# Altium PCB first_test.PcbDoc (part 2 of 5)
Units mil, origin at the board's own origin, x right, y up, seen from the top; angles counter-clockwise.
Board outline 3440.59 x 3087.6 mil, 4 copper layers (Top Layer, GND, VCC, Bottom Layer); 175 components, 91 nets, 2807 pads, 1128 vias.
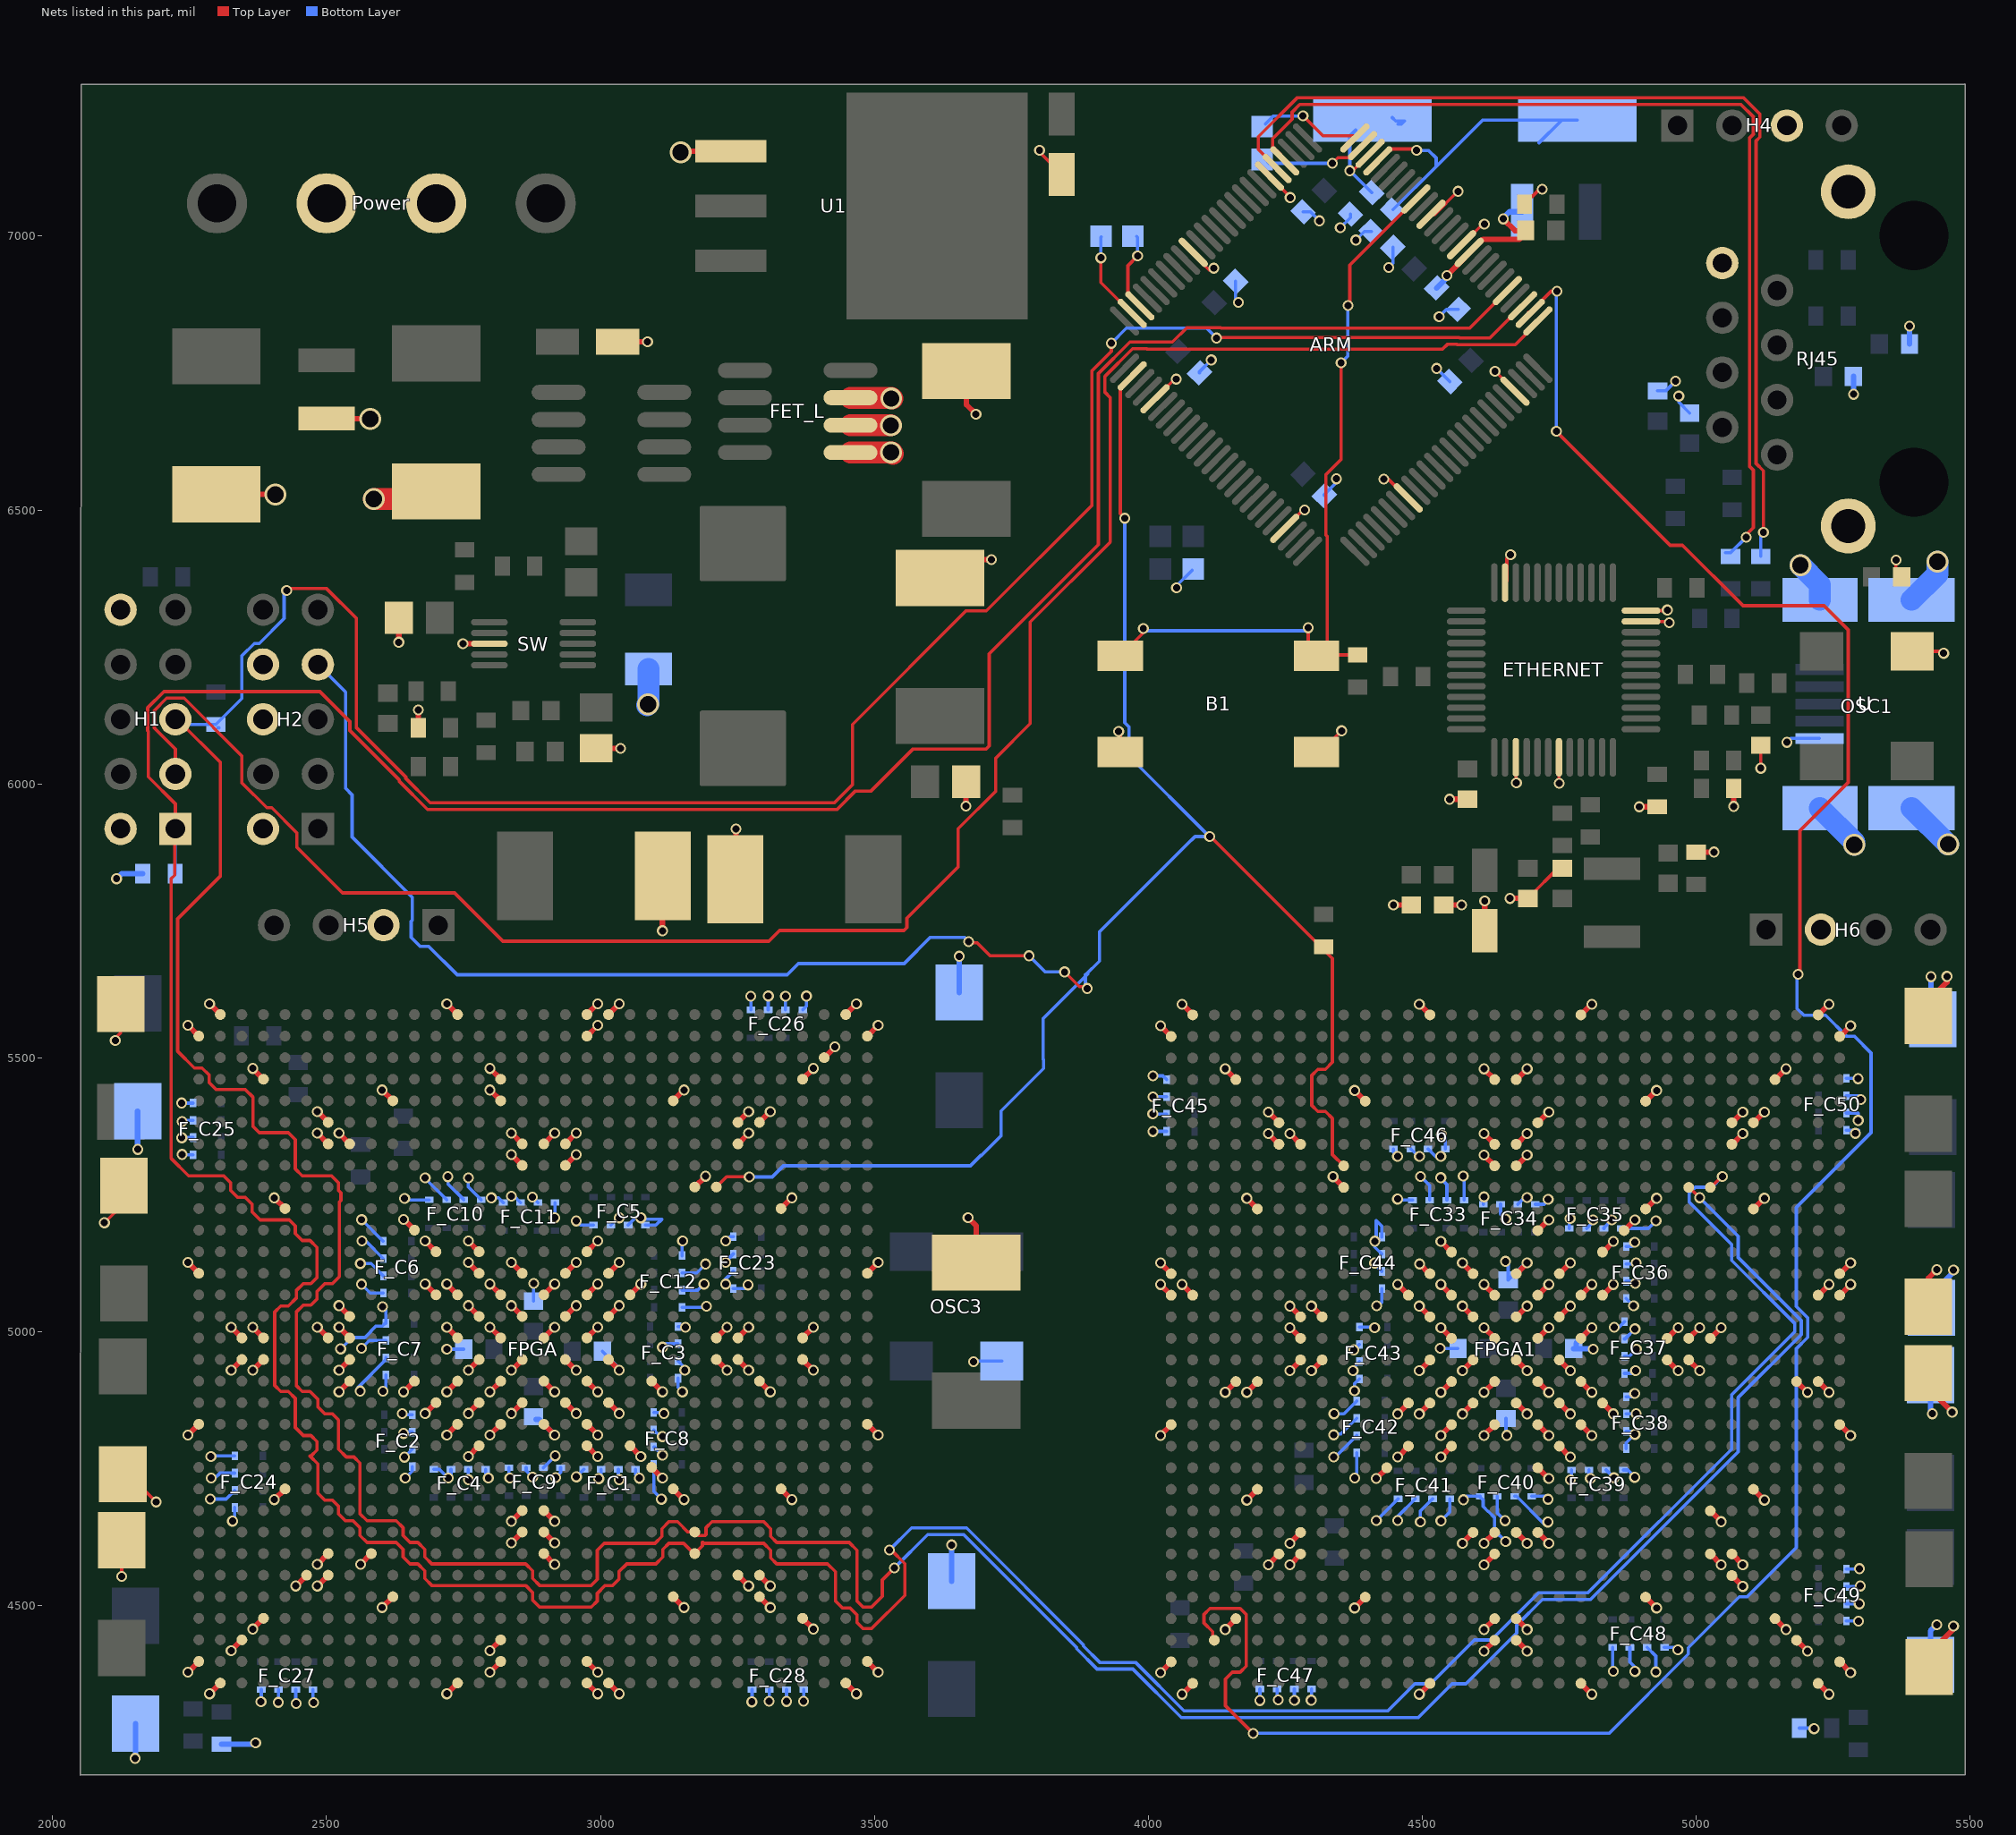
[diagram p4: the nets of this part, all layers, seen from the top]

## Via types
v1: diameter 20, hole 13, Top Layer to Bottom Layer, tented both sides, 907 vias
v2: diameter 20, hole 13, Top Layer to Bottom Layer, 189 vias
v3: diameter 30, hole 20, Top Layer to Bottom Layer, 14 vias
v4: diameter 40, hole 30, Top Layer to Bottom Layer, 12 vias
v5: diameter 50, hole 40, Top Layer to Bottom Layer, 5 vias
v6: diameter 25, hole 20, Top Layer to Bottom Layer, 1 vias

## Nets (pads, with @x,y where several pads share a name; then routed paths per layer and width w, separated by ;. In a path a pad name is that pad's centre, name@x,y a point inside that pad or via, vN(x,y) a via of type N, cw(c..) or ccw(c..) an arc to the next point about the centre after c; other vN are vias at no path point) (continued)
GND: A_C6.2 A_C7.2 A_C8.2 A_C9.2 A_C10.2 A_C11.2 A_C12.2 ARM.11 ARM.15 ARM.31 ARM.41 ARM.55 ARM.72 ARM.83 ARM.97 B1.3 B1.4 C1.2 C2.2 C3.2 C4.1 C5.2 C6.1 C11.2 C12.2 C13.2 C19.2 C20.2 C21.2 C22.2 C23.2 C24.2 C25.2 C26.1 C27.1 C28.2 C34.2 C41.1 C42.1 C43.1 diode.1 ETHERNET.15 ETHERNET.19 ETHERNET.35 ETHERNET.36 ETHERNET.47 F_60.2 F_C1.5 F_C1.6 F_C1.7 F_C1.8 F_C2.5 F_C2.6 F_C2.7 F_C2.8 F_C3.5 F_C3.6 F_C3.7 F_C3.8 F_C4.5 F_C4.6 F_C4.7 F_C4.8 F_C5.5 F_C5.6 F_C5.7 F_C5.8 F_C6.5 F_C6.6 F_C6.7 F_C6.8 F_C7.5 F_C7.6 F_C7.7 F_C7.8 F_C8.5 F_C8.6 F_C8.7 F_C8.8 F_C9.5 F_C9.6 F_C9.7 F_C9.8 F_C10.5 F_C10.6 F_C10.7 F_C10.8 F_C11.5 F_C11.6 F_C11.7 F_C11.8 F_C12.5 F_C12.6 F_C12.7 F_C12.8 F_C13.2 F_C14.2 F_C15.2 F_C16.2 F_C17.2 F_C18.2 F_C19.2 F_C20.2 F_C21.2 F_C22.2 F_C23.5 F_C23.6 F_C23.7 F_C23.8 F_C24.5 F_C24.6 F_C24.7 F_C24.8 F_C25.5 F_C25.6 F_C25.7 F_C25.8 F_C26.5 F_C26.6 F_C26.7 F_C26.8 F_C27.5 F_C27.6 F_C27.7 F_C27.8 F_C28.5 F_C28.6 F_C28.7 F_C28.8 F_C29.2 F_C30.2 F_C31.2 F_C32.2 F_C33.5 F_C33.6 F_C33.7 F_C33.8 F_C34.5 F_C34.6 F_C34.7 F_C34.8 F_C35.5 F_C35.6 F_C35.7 F_C35.8 F_C36.5 F_C36.6 F_C36.7 F_C36.8 F_C37.5 F_C37.6 F_C37.7 F_C37.8 F_C38.5 F_C38.6 F_C38.7 F_C38.8 F_C39.5 F_C39.6 F_C39.7 F_C39.8 F_C40.5 F_C40.6 F_C40.7 F_C40.8 F_C41.5 F_C41.6 F_C41.7 F_C41.8 F_C42.5 F_C42.6 F_C42.7 F_C42.8 F_C43.5 F_C43.6 F_C43.7 F_C43.8 F_C44.5 F_C44.6 F_C44.7 F_C44.8 F_C45.5 F_C45.6 F_C45.7 F_C45.8 F_C46.5 F_C46.6 F_C46.7 F_C46.8 F_C47.5 F_C47.6 F_C47.7 F_C47.8 F_C48.5 F_C48.6 F_C48.7 F_C48.8 F_C49.5 F_C49.6 F_C49.7 F_C49.8 F_C50.5 F_C50.6 F_C50.7 F_C50.8 F_C51.2 F_C52.2 F_C53.2 F_C54.2 F_C55.2 F_C56.2 F_C58.2 F_C59.2 F_C61.2 F_C62.2 F_C63.2 F_C64.2 F_C65.2 FET_L.1 FET_L.2 FET_L.3 FPGA1.A2 FPGA1.A13 FPGA1.A19 FPGA1.A20 FPGA1.A31 FPGA1.AA14 FPGA1.AA19 FPGA1.AA21 FPGA1.AB22 FPGA1.AC5 FPGA1.AC23 FPGA1.AC28 FPGA1.AD16 FPGA1.AD17 FPGA1.AE16 FPGA1.AE17 FPGA1.AF7 FPGA1.AF9 FPGA1.AF17 FPGA1.AG6 FPGA1.AG7 FPGA1.AG26 FPGA1.AG27 FPGA1.AH10 FPGA1.AH23 FPGA1.AH27 FPGA1.AJ4 FPGA1.AJ29 FPGA1.AK3 FPGA1.AK15 FPGA1.AL1 FPGA1.AL15 FPGA1.AL19 FPGA1.AL32 FPGA1.AM2 FPGA1.AM13 FPGA1.AM19 FPGA1.AM20 FPGA1.AM31 FPGA1.B1 FPGA1.B19 FPGA1.B32 FPGA1.D4 FPGA1.D15 FPGA1.D29 FPGA1.E10 FPGA1.E15 FPGA1.E23 FPGA1.F7 FPGA1.F26 FPGA1.F27 FPGA1.G7 FPGA1.G8 FPGA1.G16 FPGA1.G17 FPGA1.G18 FPGA1.G26 FPGA1.H16 FPGA1.H18 FPGA1.J24 FPGA1.K5 FPGA1.K28 FPGA1.L11 FPGA1.M12 FPGA1.M14 FPGA1.M19 FPGA1.N1 FPGA1.N14 FPGA1.N16 FPGA1.N18 FPGA1.N20 FPGA1.N32 FPGA1.P12 FPGA1.P13 FPGA1.P15 FPGA1.P17 FPGA1.P19 FPGA1.P21 FPGA1.R8 FPGA1.R14 FPGA1.R16 FPGA1.R18 FPGA1.R20 FPGA1.T3 FPGA1.T4 FPGA1.T7 FPGA1.T8 FPGA1.T13 FPGA1.T15 FPGA1.T17 FPGA1.T19 FPGA1.T25 FPGA1.T26 FPGA1.T29 FPGA1.U3 FPGA1.U4 FPGA1.U8 FPGA1.U14 FPGA1.U16 FPGA1.U18 FPGA1.U20 FPGA1.U25 FPGA1.U26 FPGA1.U29 FPGA1.V8 FPGA1.V11 FPGA1.V13 FPGA1.V15 FPGA1.V17 FPGA1.V19 FPGA1.V22 FPGA1.V27 FPGA1.W12 FPGA1.W14 FPGA1.W16 FPGA1.W18 FPGA1.W20 FPGA1.Y1 FPGA1.Y13 FPGA1.Y15 FPGA1.Y17 FPGA1.Y19 FPGA1.Y32 FPGA.A2 FPGA.A13 FPGA.A19 FPGA.A20 FPGA.A31 FPGA.AA14 FPGA.AA19 FPGA.AA21 FPGA.AB22 FPGA.AC5 FPGA.AC23 FPGA.AC28 FPGA.AD16 FPGA.AD17 FPGA.AE16 FPGA.AE17 FPGA.AF7 FPGA.AF9 FPGA.AF17 FPGA.AG6 FPGA.AG7 FPGA.AG26 FPGA.AG27 FPGA.AH10 FPGA.AH23 FPGA.AH27 FPGA.AJ4 FPGA.AJ29 FPGA.AK3 FPGA.AK15 FPGA.AL1 FPGA.AL15 FPGA.AL19 FPGA.AL32 FPGA.AM2 FPGA.AM13 FPGA.AM19 FPGA.AM20 FPGA.AM31 FPGA.B1 FPGA.B19 FPGA.B32 FPGA.C30 FPGA.D4 FPGA.D15 FPGA.D29 FPGA.E10 FPGA.E15 FPGA.E23 FPGA.F7 FPGA.F26 FPGA.F27 FPGA.G7 FPGA.G8 FPGA.G16 FPGA.G17 FPGA.G18 FPGA.G26 FPGA.H16 FPGA.H18 FPGA.J24 FPGA.K5 FPGA.K28 FPGA.L11 FPGA.M12 FPGA.M14 FPGA.M19 FPGA.N1 FPGA.N14 FPGA.N16 FPGA.N18 FPGA.N20 FPGA.N32 FPGA.P12 FPGA.P13 FPGA.P15 FPGA.P17 FPGA.P19 FPGA.P21 FPGA.R8 FPGA.R14 FPGA.R16 FPGA.R18 FPGA.R20 FPGA.T3 FPGA.T4 FPGA.T7 FPGA.T8 FPGA.T13 FPGA.T15 FPGA.T17 FPGA.T19 FPGA.T25 FPGA.T26 FPGA.T29 FPGA.U3 FPGA.U4 FPGA.U8 FPGA.U14 FPGA.U16 FPGA.U18 FPGA.U20 FPGA.U25 FPGA.U26 FPGA.U29 FPGA.V8 FPGA.V11 FPGA.V13 FPGA.V15 FPGA.V17 FPGA.V19 FPGA.V22 FPGA.V27 FPGA.W12 FPGA.W14 FPGA.W16 FPGA.W18 FPGA.W20 FPGA.Y1 FPGA.Y13 FPGA.Y15 FPGA.Y17 FPGA.Y19 FPGA.Y32 GND.1 H1.2 H1.10 H2.2 H2.6 H2.8 H4.3 H5.2 H6.2 OSC1.2 OSC3.2 Power.2 Power.3 R3.1 R12.1 R17.1 R18.1 R26.1 R36.2 R46.2 R56.2 RJ45.8 RJ45.9 RJ45.10 SW.3 U1.1 U.1 U.6 U.7 U.8 U.9 | length 17397.5
  Top Layer w6: v2(2094.49,5198.82) 2130,5234.33 F_C21.2@2130,5266.43 ; v2(2114.17,5531.48) 2114.17,5535.43 2124.03,5545.29 F_C20.2@2124.03,5597.87 ; v2(2126.06,4552.91) 2126.06,4600.47 F_C22.2@2127.95,4602.36 ; F_C19.2@2128,4739.57 2138.38,4739.57 v2(2188.98,4688.98) ; v1@2562.17,5202.4 v1(2564.11,5204.35) ; v1@2562.64,5167.67 v1(2564.75,5165.55) ; v1@2563.46,4969.15 v1(2563.88,4969.56) ; v1@2633.56,4850.42 v1(2638.07,4850.42) ; v1@2637.04,4814.01 v1(2640.67,4814.01) ; v1@2643.46,4731.97 v1(2643.46,4732.49) ; v1(2680.04,5280.84) v1@2681.61,5279.26 ; v1@2722.23,4730.72 v1(2722.23,4732.48) ; v1@2757.52,5282.13 v1(2758.79,5280.86) ; v1@2758.79,4727.16 v1(2758.79,4729.69) ; v1(2795.33,4732.48) v1@2798.63,4729.17 ; v1(2800.95,5244.3) v1@2801.5,5243.74 ; v1@2834.7,4731.49 v1(2834.7,4732.48) ; v1(2837.51,5247.1) v1@2839.17,5248.76 ; v1@2874.49,5246.84 v1(2875.57,5245.76) ; v1(2876,4734.38) v1@2878.93,4731.46 ; v1@2915.98,5208.02 v1(2916.26,5207.75) ; v1(2917.53,4773.19) v1@2918,4773.66 ; v1@2953.37,5202.1 v1(2955.63,5202.1) ; v1@2956.02,4731.5 v1(2956.02,4734.9) ; v1@2996.88,4725.64 v1(2996.88,4731.55) ; v1@3033.27,5208.7 v1(3034.31,5207.66) ; v1@3034.39,4728.6 v1(3034.39,4729.69) ; v1@3070.95,4729.72 v1(3070.95,4732.45) ; v1(3073.74,5207.75) v1@3075.71,5209.71 ; v1@3107.39,4971.53 v1(3113.11,4971.53) ; v1(3113.11,4774.67) v1@3115.29,4774.67 ; v1(3113.11,4808.42) v1@3115.35,4806.18 ; v1(3115.91,4850.61) v1@3119.98,4850.61 ; v1@3149.55,5165.42 v1(3149.83,5165.42) ; v1(3153.85,4929.33) v1@3154.92,4928.27 ; v1(3155.27,5008.09) v1@3159.7,5008.09 ; v1(3189.03,5086.81) v1@3189.03,5086.88 ; v1(3191.85,5123.36) v1@3192.06,5123.36 ; v1(3193.29,5046.12) v1@3194.95,5046.12 ; v2(3801.5,7157) 3801.5,7153.38 C12.2@3842,7112.88 ; v2(3946,6096) 3948.87,6093.13 B1.3@3948.87,6058.2 ; ARM.55@4012.46,6703.17 4048.29,6739 v1(4051,6739) ; ARM.41@4082.06,6970.43 4082.06,6967.44 4111,6938.5 4114.06,6941.56 v1(4119.71,6941.56) ; ARM.31@4221.25,7109.62 4259,7071.87 v1(4259,7070.5) ; ARM.72@4249.09,6466.54 4283.5,6500.95 4283.5,6502 v1(4285.5,6500) ; B1.4@4307.13,6058.2 4314.2,6058.2 v2(4353,6097) ; v1@4338.87,4848.52 v1@4340.14,4849.79 ; v1@4340.16,4771.04 v1@4341.74,4772.61 ; v1@4372.24,4930.17 v1(4373.9,4928.51) ; v1@4374.16,4965.49 v1(4375.24,4966.57) ; v1@4376.7,4891.95 v1@4377.26,4892.5 ; v1@4411.29,5166.71 v1@4413.25,5164.74 ; v1@4412.3,5124.27 v1(4413.34,5125.31) ; v1@4412.98,5006.98 v1(4413.25,5007.26) ; v1(4416.5,4655) v1@4416.64,4655.14 ; v1@4416.65,4655.11 v1@4418.6,4653.17 ; v1@4418.9,5044.37 v1@4418.9,5046.63 ; v1(4430,6556.5) 4434,6560.5 4472.28,6522.22 ARM.83@4474.59,6522.22 ; v1@4453.33,4653.64 v1@4455.45,4655.75 ; v1(4455,5242) 4455.58,5241.42 v1@4455.58,5240.55 ; v1(4497,5283) 4497.49,5283 4497.64,5282.85 v1@4497.64,5283.06 ; ARM.15@4516.34,7040.02 4523.1,7040.02 4565.08,7082 v1(4565.5,7082) ; v1(4534,5281) 4534,5279 4533.84,5279 4533.84,5279.68 4534.19,5280.03 v1@4534.12,5280.03 ; ARM.11@4572.02,6984.34 4572.84,6984.34 v1@4607,7018.5 ; v1@4574.88,5285.95 4574.88,5284.29 4579.59,5289 v1@4579.94,5289 ; v1(4575,5284) v1@4579.97,5288.97 ; v1@4612.91,5246.27 v1@4612.91,5250.7 ; v2(4633,6753.5) 4630,6750.5 4636.05,6750.5 ARM.97@4669.46,6717.09 ; ETHERNET.47@4651.42,6367.45 4654.5,6370.53 4654.5,6411.5 v2(4661.5,6418.5) ; v1(4651.44,4654.88) v1@4651.85,4654.46 ; ETHERNET.15@4671.1,6048.55 4671.1,6002.9 v2(4672,6002) ; R26.1@4686.97,7058.5 4714.23,7085.76 v2(4719.16,7085.76) ; v1(4691.67,5244.85) v1@4692.73,5245.92 ; C24.2@4696.77,5786.89 4696.77,5794.93 4747.86,5846.02 C20.2@4755.91,5846.02 ; ETHERNET.19@4749.84,6048.55 4749.84,6001.16 v2(4750,6001) ; v1@4770.39,5206.91 v1@4770.39,5210.98 ; v1@4770.58,4724.56 v1@4770.58,4729.07 ; v1@4806.99,4728.04 v1(4806.99,4731.67) ; v1@4812.58,5204.11 v1@4814.82,5206.35 ; v1(4846.33,5204.11) v1@4846.33,5206.29 ; v1(4886.1,5047.02) v1@4889.5,5047.02 ; v1@4888.51,4734.46 v1@4889.03,4734.46 ; v1@4888.52,4813.23 v1@4890.28,4813.23 ; v1@4888.52,4886.33 v1@4891.83,4889.63 ; v1@4888.55,5161.95 v1@4891.28,5161.95 ; v1@4889.45,5087.88 v1@4895.36,5087.88 ; v1@4891.31,4849.79 v1@4893.84,4849.79 ; v1@4891.31,5125.39 v1@4892.4,5125.39 ; ETHERNET.35@4899.45,6296.58 4948.92,6296.58 v2@4950,6295.5 ; ETHERNET.36@4899.45,6316.27 4946.27,6316.27 v2(4947.5,6317.5) ; v2(5118.11,6028.5) C21.2@5118.11,6070.43 ; v2(5365,6408.5) 5365,6391.87 5375.56,6381.31 C28.2@5375.56,6378 ; OSC1.2@5394.68,6242 5448.5,6242 v2(5452,6238.5)
  Top Layer w10: F_C22.2@2130,4594.24 F_C22.2@2130,4660.43 ; v1(2246.97,4378.15) FPGA.AL1@2266.65,4397.84 ; v1(2246.97,4811.22) FPGA.Y1@2266.65,4830.91 ; v1(2246.97,5126.18) FPGA.N1@2266.65,5106.5 ; v1(2246.97,5559.25) FPGA.B1@2266.65,5539.57 ; v1(2286.34,4338.78) FPGA.AM2@2306.02,4358.47 ; v1(2286.34,5598.62) FPGA.A2@2306.02,5578.94 ; C11.2@2298.58,6528.7 v4@2394.29,6528.7 ; v1(2325.71,4417.52) FPGA.AK3@2345.39,4437.21 ; v1(2325.71,4929.33) FPGA.U3@2345.39,4949.02 ; v1(2325.71,5008.07) FPGA.T3@2345.39,4988.39 ; v1(2365.08,4456.89) FPGA.AJ4@2384.76,4476.58 ; v1(2365.08,4929.33) FPGA.U4@2384.76,4949.02 ; v1(2365.08,5008.07) FPGA.T4@2384.76,4988.39 ; v1(2365.08,5480.51) FPGA.D4@2384.76,5460.83 ; v1(2404.45,4693.11) FPGA.AC5@2424.13,4712.8 ; v1(2404.45,5244.29) FPGA.K5@2424.13,5224.61 ; v1(2443.82,4535.63) FPGA.AG6@2463.5,4555.32 ; v1(2483.19,4535.63) FPGA.AG7@2502.87,4555.32 ; v1(2483.19,4575) FPGA.AF7@2502.87,4594.69 ; v1(2483.19,5008.07) FPGA.T7@2502.87,4988.39 ; v1(2483.19,5362.4) FPGA.G7@2502.87,5342.72 ; v1(2483.19,5401.77) FPGA.F7@2502.87,5382.09 ; C1.2@2500,6666.85 v4@2566.18,6666.85 ; v1(2522.56,4889.96) FPGA.V8@2542.24,4909.65 ; v1(2522.56,4929.33) FPGA.U8@2542.24,4949.02 ; v1(2522.56,5008.07) FPGA.T8@2542.24,4988.39 ; v1(2522.56,5047.44) FPGA.R8@2542.24,5027.76 ; v1(2522.56,5362.4) FPGA.G8@2542.24,5342.72 ; v1(2561.93,4575) FPGA.AF9@2581.61,4594.69 ; v1(2601.3,4496.26) FPGA.AH10@2620.98,4515.95 ; v1(2601.3,5441.14) FPGA.E10@2620.98,5421.46 ; v2(2631.89,6258.62) C3.2@2631.89,6303.15 ; v1(2640.67,4889.96) FPGA.V11@2660.35,4909.65 ; v1(2640.67,5204.92) FPGA.L11@2660.35,5185.24 ; R3.1@2667.32,6102.36 v2(2667.32,6135.08) ; v1(2680.04,4850.59) FPGA.W12@2699.72,4870.28 ; v1(2680.04,5086.81) FPGA.P12@2699.72,5067.13 ; v1(2680.04,5165.55) FPGA.M12@2699.72,5145.87 ; v1(2719.41,4338.78) FPGA.AM13@2739.09,4358.47 ; v1(2719.41,4811.22) FPGA.Y13@2739.09,4830.91 ; v1(2719.41,4889.96) FPGA.V13@2739.09,4909.65 ; v1(2719.41,5008.07) FPGA.T13@2739.09,4988.39 ; v1(2719.41,5086.81) FPGA.P13@2739.09,5067.13 ; v1(2719.41,5598.62) FPGA.A13@2739.09,5578.94 ; v2(2748.78,6255.91) SW.3@2797.24,6255.91 ; v1(2758.78,4771.85) FPGA.AA14@2778.46,4791.54 ; v1(2758.78,4850.59) FPGA.W14@2778.46,4870.28 ; v1(2758.78,4929.33) FPGA.U14@2778.46,4949.02 ; v1(2758.78,5047.44) FPGA.R14@2778.46,5027.76 ; v1(2758.78,5126.18) FPGA.N14@2778.46,5106.5 ; v1(2758.78,5165.55) FPGA.M14@2778.46,5145.87 ; v1(2798.15,4378.15) FPGA.AL15@2817.83,4397.84 ; v1(2798.15,4417.52) FPGA.AK15@2817.83,4437.21 ; v1(2798.15,4811.22) FPGA.Y15@2817.83,4830.91 ; v1(2798.15,4889.96) FPGA.V15@2817.83,4909.65 ; v1(2798.15,5008.07) FPGA.T15@2817.83,4988.39 ; v1(2798.15,5086.81) FPGA.P15@2817.83,5067.13 ; v1(2798.15,5441.14) FPGA.E15@2817.83,5421.46 ; v1(2798.15,5480.51) FPGA.D15@2817.83,5460.83 ; v1(2837.52,4614.37) FPGA.AE16@2857.21,4634.06 ; v1(2837.52,4653.74) FPGA.AD16@2857.21,4673.43 ; v1(2837.52,4850.59) FPGA.W16@2857.21,4870.28 ; v1(2837.52,4929.33) FPGA.U16@2857.21,4949.02 ; v1(2837.52,5047.44) FPGA.R16@2857.21,5027.76 ; v1(2837.52,5126.18) FPGA.N16@2857.21,5106.5 ; v1(2837.52,5323.03) FPGA.H16@2857.21,5303.35 ; v1(2837.52,5362.4) FPGA.G16@2857.21,5342.72 ; FPGA.AF17@2896.58,4594.69 v1(2916.26,4575) ; FPGA.AE17@2896.58,4634.06 v1(2916.26,4614.37) ; FPGA.AD17@2896.58,4673.43 v1(2916.26,4653.74) ; FPGA.Y17@2896.58,4830.91 v1(2916.26,4811.22) ; FPGA.V17@2896.58,4909.65 v1(2916.26,4889.96) ; FPGA.T17@2896.58,4988.39 v1(2916.26,5008.07) ; FPGA.P17@2896.58,5067.13 v1(2916.26,5086.81) ; FPGA.G17@2896.58,5342.72 v1(2916.26,5362.4) ; FPGA.W18@2935.95,4870.28 v1(2955.63,4850.59) ; FPGA.U18@2935.95,4949.02 v1(2955.63,4929.33) ; FPGA.R18@2935.95,5027.76 v1(2955.63,5047.44) ; FPGA.N18@2935.95,5106.5 v1(2955.63,5126.18) ; FPGA.H18@2935.95,5303.35 v1(2955.63,5323.03) ; FPGA.G18@2935.95,5342.72 v1(2955.63,5362.4) ; FPGA.AM19@2975.32,4358.47 v1(2995,4338.78) ; FPGA.AL19@2975.32,4397.84 v1(2995,4378.15) ; FPGA.AA19@2975.32,4791.54 v1(2995,4771.85) ; FPGA.Y19@2975.32,4830.91 v1(2995,4811.22) ; FPGA.V19@2975.32,4909.65 v1(2995,4889.96) ; FPGA.T19@2975.32,4988.39 v1(2995,5008.07) ; FPGA.P19@2975.32,5067.13 v1(2995,5086.81) ; FPGA.M19@2975.32,5145.87 v1(2995,5165.55) ; FPGA.B19@2975.32,5539.57 v1(2995,5559.25) ; FPGA.A19@2975.32,5578.94 v1(2995,5598.62) ; C4.1@2992.13,6064.96 v2(3036.65,6064.96) ; FPGA.AM20@3014.69,4358.47 v1(3034.37,4338.78) ; FPGA.W20@3014.69,4870.28 v1(3034.37,4850.59) ; FPGA.U20@3014.69,4949.02 v1(3034.37,4929.33) ; FPGA.R20@3014.69,5027.76 v1(3034.37,5047.44) ; FPGA.N20@3014.69,5106.5 v1(3034.37,5126.18) ; FPGA.A20@3014.69,5578.94 v1(3034.37,5598.62) ; C13.2@3031.5,6807.09 v2(3085.87,6807.09) ; FPGA.AA21@3054.06,4791.54 v1(3073.74,4771.85) ; FPGA.P21@3054.06,5067.13 v1(3073.74,5086.81) ; FPGA.AB22@3093.43,4752.17 v1(3113.11,4732.48) ; FPGA.V22@3093.43,4909.65 v1(3113.11,4889.96) ; v2(3113.06,5731.88) 3113.06,5740.14 F_C17.2@3113.06,5827.59 ; FPGA.AH23@3132.8,4515.95 v1(3152.48,4496.26) ; FPGA.AC23@3132.8,4712.8 v1(3152.48,4693.11) ; FPGA.E23@3132.8,5421.46 v1(3152.48,5441.14) ; v4@3158.23,7155.12 U1.1@3238.19,7155.12 ; FPGA.J24@3172.17,5263.98 v1(3191.85,5283.66) ; FPGA.U25@3211.54,4949.02 v1(3231.22,4929.33) ; FPGA.T25@3211.54,4988.39 v1(3231.22,5008.07) ; F_C18.2@3247.17,5822.24 3247.17,5909.69 v2(3247.17,5917.95) ; FPGA.AG26@3250.91,4555.32 v1(3270.59,4535.63) ; FPGA.U26@3250.91,4949.02 v1(3270.59,4929.33) ; FPGA.T26@3250.91,4988.39 v1(3270.59,5008.07) ; FPGA.G26@3250.91,5342.72 v1(3270.59,5362.4) ; FPGA.F26@3250.91,5382.09 v1(3270.59,5401.77) ; FPGA.AH27@3290.28,4515.95 v1(3309.96,4496.26) ; FPGA.AG27@3290.28,4555.32 v1(3309.96,4535.63) ; FPGA.V27@3290.28,4909.65 v1(3309.96,4889.96) ; FPGA.F27@3290.28,5382.09 v1(3309.96,5401.77) ; FPGA.AC28@3329.65,4712.8 v1(3349.33,4693.11) ; FPGA.K28@3329.65,5224.61 v1(3349.33,5244.29) ; FPGA.AJ29@3369.02,4476.58 v1(3388.7,4456.89) ; FPGA.U29@3369.02,4949.02 v1(3388.7,4929.33) ; FPGA.T29@3369.02,4988.39 v1(3388.7,5008.07) ; FPGA.D29@3369.02,5460.83 v1(3388.7,5480.51) ; FPGA.C30@3408.39,5500.2 v1(3428.07,5519.88) ; FPGA.AM31@3447.76,4358.47 v1(3467.44,4338.78) ; FPGA.A31@3447.76,5578.94 v1(3467.44,5598.62) ; FPGA.AL32@3487.13,4397.84 v1(3506.81,4378.15) ; FPGA.Y32@3487.13,4830.91 v1(3506.81,4811.22) ; FPGA.N32@3487.13,5106.5 v1(3506.81,5126.18) ; FPGA.B32@3487.13,5539.57 v1(3506.81,5559.25) ; C5.2@3618.11,6409.45 v2(3713.82,6409.45) ; v2(3667.32,5959.41) C6.1@3667.32,6003.94 ; F_60.2@3668,6753.98 3668,6692.5 v2(3685.5,6675) ; v2(3671,5208) 3686,5193 F_C61.2@3686,5125.98 ; v1(4022.38,4377.34) FPGA1.A2@4042.06,4397.02 ; v1(4022.38,4810.41) FPGA1.A13@4042.06,4830.09 ; v1(4022.38,5086) FPGA1.A19@4042.06,5066.32 ; v1(4022.38,5125.37) FPGA1.A20@4042.06,5105.69 ; v1(4022.38,5558.44) FPGA1.A31@4042.06,5538.76 ; v1(4061.75,4337.97) FPGA1.B1@4081.43,4357.65 ; v1(4061.75,5086) FPGA1.B19@4081.43,5066.32 ; v1(4061.75,5597.81) FPGA1.B32@4081.43,5578.13 ; v1(4140.49,4456.08) FPGA1.D4@4160.17,4475.76 ; v1(4140.49,4889.15) FPGA1.D15@4160.17,4908.83 ; v1(4140.49,5479.7) FPGA1.D29@4160.17,5460.02 ; v1(4179.86,4692.3) FPGA1.E10@4199.54,4711.98 ; v1(4179.86,4889.15) FPGA1.E15@4199.54,4908.83 ; v1(4179.86,5243.48) FPGA1.E23@4199.54,5223.8 ; v1(4219.23,4574.19) FPGA1.F7@4238.91,4593.87 ; v1(4219.23,5361.59) FPGA1.F26@4238.91,5341.91 ; v1(4219.23,5400.96) FPGA1.F27@4238.91,5381.28 ; v1(4258.6,4574.19) FPGA1.G7@4278.28,4593.87 ; v1(4258.6,4613.56) FPGA1.G8@4278.28,4633.24 ; v1(4258.6,4928.52) FPGA1.G16@4278.28,4948.21 ; v1(4258.6,5007.26) FPGA1.G17@4278.28,4987.58 ; v1(4258.6,5046.63) FPGA1.G18@4278.28,5026.95 ; v1(4258.6,5361.59) FPGA1.G26@4278.28,5341.91 ; v1(4297.97,4928.52) FPGA1.H16@4317.65,4948.21 ; v1(4297.97,5046.63) FPGA1.H18@4317.65,5026.95 ; v1(4337.34,5282.85) FPGA1.J24@4357.02,5263.17 ; v1(4376.71,4495.45) FPGA1.K5@4396.39,4515.13 ; v1(4376.71,5440.33) FPGA1.K28@4396.39,5420.65 ; v1(4416.08,4731.67) FPGA1.L11@4435.76,4751.35 ; v2(4447.6,5779.09) C22.2@4480.31,5779.09 ; v1(4455.45,4771.04) FPGA1.M12@4475.13,4790.72 ; v1(4455.45,4849.78) FPGA1.M14@4475.13,4869.46 ; v1(4455.45,5086) FPGA1.M19@4475.13,5066.32 ; v1(4494.82,4337.97) FPGA1.N1@4514.5,4357.65 ; v1(4494.82,4849.78) FPGA1.N14@4514.5,4869.46 ; v1(4494.82,4928.52) FPGA1.N16@4514.5,4948.21 ; v1(4494.82,5046.63) FPGA1.N18@4514.5,5026.95 ; v1(4494.82,5597.81) FPGA1.N32@4514.5,5578.13 ; v1(4495.5,5123.5) 4513.2,5105.8 FPGA1.N20@4514.2,5105.8 ; v1(4534.19,4771.04) FPGA1.P12@4553.87,4790.72 ; v1(4534.19,4810.41) FPGA1.P13@4553.87,4830.09 ; v1(4534.19,4889.15) FPGA1.P15@4553.87,4908.83 ; v1(4534.19,5007.26) FPGA1.P17@4553.87,4987.58 ; v1(4534.19,5086) FPGA1.P19@4553.87,5066.32 ; v1(4534.19,5164.74) FPGA1.P21@4553.87,5145.06 ; C23.2@4539.37,5779.09 v2(4572.09,5779.09) ; v2(4549.96,5972.01) C19.2@4582.68,5972.01 ; v1(4573.56,4613.56) FPGA1.R8@4593.24,4633.24 ; v1(4573.56,4849.78) FPGA1.R14@4593.24,4869.46 ; v1(4573.56,4928.52) FPGA1.R16@4593.24,4948.21 ; v1(4573.56,5046.63) FPGA1.R18@4593.24,5026.95 ; v1(4573.56,5125.37) FPGA1.R20@4593.24,5105.69 ; v1(4612.93,4416.71) FPGA1.T3@4632.61,4436.39 ; v1(4612.93,4456.08) FPGA1.T4@4632.61,4475.76 ; v1(4612.93,4574.19) FPGA1.T7@4632.61,4593.87 ; v1(4612.93,4613.56) FPGA1.T8@4632.61,4633.24 ; v1(4612.93,4810.41) FPGA1.T13@4632.61,4830.09 ; v1(4612.93,4889.15) FPGA1.T15@4632.61,4908.83 ; v1(4612.93,5007.26) FPGA1.T17@4632.61,4987.58 ; v1(4612.93,5086) FPGA1.T19@4632.61,5066.32 ; v1(4612.93,5322.22) FPGA1.T25@4632.61,5302.54 ; v1(4612.93,5361.59) FPGA1.T26@4632.61,5341.91 ; v1(4612.93,5479.7) FPGA1.T29@4632.61,5460.02 ; C25.2@4614.17,5731.85 v2(4614.17,5786.22) ; v2(4660.2,5790.91) C24.2@4692.91,5790.91 ; FPGA1.U3@4671.98,4436.39 v1(4691.67,4416.71) ; FPGA1.U4@4671.98,4475.76 v1(4691.67,4456.08) ; FPGA1.U8@4671.98,4633.24 v1(4691.67,4613.56) ; FPGA1.U14@4671.98,4869.46 v1(4691.67,4849.78) ; FPGA1.U16@4671.98,4948.21 v1(4691.67,4928.52) ; FPGA1.U18@4671.98,5026.95 v1(4691.67,5046.63) ; FPGA1.U20@4671.98,5105.69 v1(4691.67,5125.37) ; FPGA1.U25@4671.98,5302.54 v1(4691.67,5322.22) ; FPGA1.U26@4671.98,5341.91 v1(4691.67,5361.59) ; FPGA1.U29@4671.98,5460.02 v1(4691.67,5479.7) ; FPGA1.V8@4711.35,4633.24 v1(4731.04,4613.56) ; FPGA1.V11@4711.35,4751.35 v1(4731.04,4731.67) ; FPGA1.V13@4711.35,4830.09 v1(4731.04,4810.41) ; FPGA1.V15@4711.35,4908.83 v1(4731.04,4889.15) ; FPGA1.V17@4711.35,4987.58 v1(4731.04,5007.26) ; FPGA1.V19@4711.35,5066.32 v1(4731.04,5086) ; FPGA1.V22@4711.35,5184.43 v1(4731.04,5204.11) ; FPGA1.V27@4711.35,5381.28 v1(4731.04,5400.96) ; FPGA1.W12@4750.72,4790.72 v1(4770.41,4771.04) ; FPGA1.W14@4750.72,4869.46 v1(4770.41,4849.78) ; FPGA1.W16@4750.72,4948.21 v1(4770.41,4928.52) ; FPGA1.W18@4750.72,5026.95 v1(4770.41,5046.63) ; FPGA1.W20@4750.72,5105.69 v1(4770.41,5125.37) ; FPGA1.Y1@4790.09,4357.65 v1(4809.78,4337.97) ; FPGA1.Y13@4790.09,4830.09 v1(4809.78,4810.41) ; FPGA1.Y15@4790.09,4908.83 v1(4809.78,4889.15) ; FPGA1.Y17@4790.09,4987.58 v1(4809.78,5007.26) ; FPGA1.Y19@4790.09,5066.32 v1(4809.78,5086) ; FPGA1.Y32@4790.09,5578.13 v1(4809.78,5597.81) ; FPGA1.AA14@4829.46,4869.46 v1(4849.15,4849.78) ; FPGA1.AA19@4829.46,5066.32 v1(4849.15,5086) ; FPGA1.AA21@4829.46,5145.06 v1(4849.15,5164.74) ; FPGA1.AB22@4868.83,5184.43 v1(4888.52,5204.11) ; v2(4896.42,5958.23) R18.1@4929.13,5958.23 ; FPGA1.AC5@4908.2,4515.13 v1(4927.89,4495.45) ; FPGA1.AC23@4908.2,5223.8 v1(4927.89,5243.48) ; FPGA1.AC28@4908.2,5420.65 v1(4927.89,5440.33) ; FPGA1.AD16@4947.57,4948.21 v1(4967.26,4928.52) ; FPGA1.AD17@4947.57,4987.58 v1(4967.26,5007.26) ; FPGA1.AE16@4986.94,4948.21 v1(5006.63,4928.52) ; FPGA1.AE17@4986.94,4987.58 v1(5006.63,5007.26) ; R12.1@5000,5875.55 v2(5032.72,5875.55) ; FPGA1.AF7@5026.31,4593.87 v1(5046,4574.19) ; FPGA1.AF9@5026.31,4672.61 v1(5046,4652.93) ; FPGA1.AF17@5026.31,4987.58 v1(5046,5007.26) ; FPGA1.AG6@5065.68,4554.5 v1(5085.37,4534.82) ; FPGA1.AG7@5065.68,4593.87 v1(5085.37,4574.19) ; FPGA1.AG26@5065.68,5341.91 v1(5085.37,5361.59) ; FPGA1.AG27@5065.68,5381.28 v1(5085.37,5400.96) ; v2(5068.9,5958.98) R17.1@5068.9,5991.69 ; FPGA1.AH10@5105.05,4711.98 v1(5124.74,4692.3) ; FPGA1.AH23@5105.05,5223.8 v1(5124.74,5243.48) ; FPGA1.AH27@5105.05,5381.28 v1(5124.74,5400.96) ; FPGA1.AJ4@5144.42,4475.76 v1(5164.11,4456.08) ; FPGA1.AJ29@5144.42,5460.02 v1(5164.11,5479.7) ; FPGA1.AK3@5183.79,4436.39 v1(5203.48,4416.71) ; FPGA1.AK15@5183.79,4908.83 v1(5203.48,4889.15) ; FPGA1.AL1@5223.16,4357.65 v1(5242.85,4337.97) ; FPGA1.AL15@5223.16,4908.83 v1(5242.85,4889.15) ; FPGA1.AL19@5223.16,5066.32 v1(5242.85,5086) ; FPGA1.AL32@5223.16,5578.13 v1(5242.85,5597.81) ; FPGA1.AM2@5262.53,4397.02 v1(5282.22,4377.34) ; FPGA1.AM13@5262.53,4830.09 v1(5282.22,4810.41) ; FPGA1.AM19@5262.53,5066.32 v1(5282.22,5086) ; FPGA1.AM20@5262.53,5105.69 v1(5282.22,5125.37) ; FPGA1.AM31@5262.53,5538.76 v1(5282.22,5558.44) ; F_C64.2@5424,4924.43 5424,4896.5 v2(5467.5,4853) ; F_C63.2@5424,5045.57 5424,5097.5 v2(5439.5,5113) ; F_C62.2@5424,5576.43 5424,5604 5458,5638 v2(5458,5648.5) ; F_C65.2@5426,4387.57 5426,4413.28 5470,4457.28 v2(5470,4462.5)
  Top Layer w40: v4(2586.5,6520) 2685.98,6520 C2.2@2700,6534.02 ; FET_L.1@3456.46,6605 3532,6605 v4@3534,6603 ; FET_L.2@3456.46,6655 3529.5,6655 v4(3530,6654.5) ; FET_L.3@3456.46,6705 3531,6705 v4@3532.5,6703.5
  Bottom Layer w6: v1(2235.47,5417.4) 2235.63,5417.24 F_C25.8@2256.41,5417.24 ; v1(2235.79,5354.02) 2236.02,5354.25 F_C25.6@2256.41,5354.25 ; v1(2236.1,5323.54) 2236.89,5322.76 F_C25.5@2256.41,5322.76 ; v1(2236.42,5383.82) 2238.35,5385.75 F_C25.7@2256.41,5385.75 ; v1(2287.64,4694.37) 2316.53,4694.37 F_C24.6@2332.41,4710.25 ; v1(2288.74,4771.97) 2290.02,4773.24 F_C24.8@2332.41,4773.24 ; v1(2289.14,4732.49) 2296.35,4732.49 2305.61,4741.75 F_C24.7@2332.41,4741.75 ; v1(2328.19,4654.05) 2332.41,4658.27 F_C24.5@2332.41,4678.76 ; v1(2380.2,4324.25) 2380.76,4324.81 F_C27.8@2380.76,4346.41 ; v1(2411.97,4323.11) 2412.25,4323.39 F_C27.7@2412.25,4346.41 ; F_C27.6@2443.75,4346.41 2443.75,4321.88 v1(2444.49,4321.14) ; F_C27.5@2475.24,4346.41 2475.24,4323.73 v1(2476.26,4322.72) ; v1(2525.71,4968.46) 2546.32,4989.07 2569.8,4989.07 2580.93,5000.2 ; v1(2561.3,4891.5) 2558.03,4894.76 2558.03,4898.56 2608.41,4948.94 F_C7.6@2608.41,4952.25 ; v1(2561.69,5124.33) 2581.14,5124.33 F_C6.6@2603.57,5101.91 ; v1(2563.54,5086.65) 2579.79,5070.41 F_C6.5@2603.57,5070.41 ; v1(2563.88,4969.56) 2578.08,4983.75 F_C7.7@2608.41,4983.75 ; v1(2564.11,5204.35) F_C6.8@2603.57,5164.9 ; v1(2564.75,5165.55) 2571.42,5165.55 F_C6.7@2603.57,5133.4 ; 2580.93,5000.93 2589.8,5009.8 2601.66,5009.8 2607.1,5015.24 F_C7.8@2608.41,5015.24 2608.41,5039.05 v1(2602.05,5045.41) ; v1(2602.88,4891.16) 2608.41,4896.68 F_C7.5@2608.41,4920.76 ; v1(2638.07,4850.42) 2640.31,4848.17 F_C2.5@2656.48,4848.17 ; v1(2640.67,4814.01) 2643.33,4816.68 F_C2.6@2656.48,4816.68 ; v1(2642.09,4770.79) F_C2.7@2656.48,4785.18 ; v1(2642.4,5243.27) 2645.15,5240.52 F_C10.5@2687.65,5240.52 ; v1(2643.46,4732.49) 2656.48,4745.51 F_C2.8@2656.48,4753.68 ; v1(2680.04,5280.84) 2680.04,5279.62 F_C10.6@2719.14,5240.52 ; F_C4.5@2695.65,4748.52 2705.93,4748.52 v1@2722.72,4731.73 ; v1(2719.48,4968) F_C29.2@2750.44,4968 ; v1(2721.48,5282.95) 2721.97,5282.46 2721.97,5269.19 F_C10.7@2750.64,5240.52 ; v1(2722.23,4732.48) 2727.14,4737.39 F_C4.6@2727.14,4748.52 ; F_C4.7@2758.64,4748.52 2758.64,4729.85 v1(2758.79,4729.69) ; v1(2758.79,5280.86) 2758.79,5263.87 F_C10.8@2782.13,5240.52 ; F_C4.8@2790.13,4748.52 2790.13,4737.67 v1(2795.33,4732.48) ; v1(2800.95,5244.3) 2814.05,5244.3 F_C11.5@2822.76,5235.59 ; F_C9.5@2832.76,4751.59 2832.76,4734.42 v1(2834.7,4732.48) ; v1(2837.51,5247.1) 2842.75,5247.1 F_C11.6@2854.25,5235.59 ; F_C9.6@2864.25,4751.59 2864.25,4746.14 v1(2876,4734.38) ; v1(2875.57,5245.76) F_C11.7@2885.75,5235.59 ; F_C31.2@2878,5055.56 v1(2878,5087.91) ; F_C9.7@2895.75,4751.59 2917.35,4773.19 v1(2917.53,4773.19) ; v1(2916.26,5207.75) 2917.24,5208.73 F_C11.8@2917.24,5235.59 ; v1(2918.04,4733.52) 2927.24,4742.72 F_C9.8@2927.24,4751.59 ; v1(2955.63,5202.1) 2963.3,5194.43 F_C5.8@2987.43,5194.43 ; v1(2956.02,4734.9) F_C1.5@2969.64,4748.52 ; v1(2996.88,4731.55) 3001.14,4735.8 F_C1.6@3001.14,4748.52 ; F_C32.2@3003.56,4964 3032.68,4934.88 v1@3032.68,4928.66 ; F_C5.7@3018.92,5194.43 3032.15,5207.66 v1(3034.31,5207.66) ; F_C1.7@3032.64,4748.52 3032.64,4731.45 v1(3034.39,4729.69) ; F_C5.6@3050.42,5194.43 3063.74,5207.75 v1(3073.74,5207.75) ; F_C1.8@3064.13,4748.52 3064.13,4739.27 v1(3070.95,4732.45) ; v1@3076.55,5204.94 3111.67,5204.94 3101.16,5194.43 F_C5.5@3081.91,5194.43 ; F_C8.5@3097.3,4757.68 3097.3,4708 v1(3111.26,4694.04) ; F_C8.6@3097.3,4789.18 3098.6,4789.18 v1(3113.11,4774.67) ; F_C8.7@3097.3,4820.68 3109.56,4808.42 v1(3113.11,4808.42) ; F_C8.8@3097.3,4852.17 3114.35,4852.17 v1(3115.91,4850.61) ; v1(3113.11,4971.53) 3119.33,4977.75 F_C3.6@3141.59,4977.75 ; F_C3.8@3141.59,4914.76 3141.59,4898.06 v1(3149.68,4889.97) ; F_C3.7@3141.59,4946.25 3153.85,4933.99 v1(3153.85,4929.33) ; F_C3.5@3141.59,5009.24 3154.12,5009.24 v1(3155.27,5008.09) ; F_C12.8@3149.09,5044.25 3191.43,5044.25 v1(3193.29,5046.12) ; F_C12.7@3149.09,5075.75 3177.64,5075.75 3188.7,5086.81 v1(3189.03,5086.81) ; F_C12.6@3149.09,5107.24 3175.74,5107.24 v1(3191.85,5123.36) ; F_C12.5@3149.09,5138.74 3149.09,5164.68 v1(3149.83,5165.42) ; v1(3228.44,5086.78) 3228.44,5096.28 F_C23.6@3242.41,5110.25 ; v1(3228.44,5126.18) 3228.44,5127.77 F_C23.7@3242.41,5141.75 ; v1(3228.44,5165.54) 3236.14,5173.24 F_C23.8@3242.41,5173.24 ; F_C23.5@3242.41,5078.76 3262.97,5078.76 v1(3269.41,5085.2) ; v1(3274.45,5612.36) 3274.76,5612.06 F_C26.5@3274.76,5587.59 ; v1(3276.38,4324.06) 3276.76,4324.43 F_C28.8@3276.76,4346.41 ; F_C26.6@3306.25,5587.59 3306.25,5612.55 v1(3306.46,5612.76) ; v1(3307.8,4325.16) 3308.25,4325.61 F_C28.7@3308.25,4346.41 ; v1(3337.68,5612.36) 3337.75,5612.29 F_C26.7@3337.75,5587.59 ; F_C28.6@3339.75,4346.41 3339.75,4324.94 v1(3339.8,4324.88) ; F_C26.8@3369.24,5587.59 3375.98,5594.33 v1(3375.98,5612.56) ; v1(3370.67,4325.16) 3371.24,4325.73 F_C28.5@3371.24,4346.41 ; v2(3681.1,4944.88) 3682.22,4946 OSC3.2@3732.68,4946 ; v1(4008.24,5397.46) 4008.45,5397.25 F_C45.6@4033.41,5397.25 ; v1(4008.44,5466.98) 4026.67,5466.98 F_C45.8@4033.41,5460.24 ; v1(4008.64,5365.45) 4008.94,5365.76 F_C45.5@4033.41,5365.76 ; v1(4008.64,5428.68) 4008.71,5428.75 F_C45.7@4033.41,5428.75 ; v2(4051.5,6358) 4051.5,6361.5 GND.1@4080,6390 ; A_C12.2@4093.49,6750.51 4093.49,6752.49 v1(4115,6774) ; A_C6.2@4159.49,6917.49 4159.49,6884.01 v1(4164.5,6879) ; v1(4203.6,4326.47) 4203.76,4326.63 F_C47.8@4203.76,4347.41 ; F_C47.7@4235.25,4347.41 4235.25,4329.35 v1(4237.18,4327.42) ; F_C47.6@4266.75,4347.41 4266.75,4327.02 v1(4266.98,4326.79) ; A_C9.2@4282.51,7044.51 4295.99,7044.51 v1(4312.5,7028) ; v1(4297.46,4327.1) 4298.24,4327.89 F_C47.5@4298.24,4347.41 ; A_C8.2@4321.49,6526.51 4321.49,6528.49 4343.5,6550.5 v1(4343.5,6557) ; v1@4338.05,4812.48 4338.54,4812.97 4351.81,4812.97 F_C42.7@4380.48,4841.64 ; v1@4340.16,4771.04 4341.38,4771.04 F_C42.6@4380.48,4810.14 ; v1@4340.14,4849.79 4357.13,4849.79 F_C42.8@4380.48,4873.13 ; v1(4350.5,7015.5) 4369.01,7034.01 C42.1@4369.01,7040.51 ; v1(4373.9,4928.51) 4373.9,4933.75 F_C43.6@4385.41,4945.25 ; v1(4375.24,4966.57) F_C43.7@4385.41,4976.75 ; v1@4376.7,4891.95 4376.7,4905.05 F_C43.5@4385.41,4913.76 ; v1@4377.73,4733.4 4380.48,4736.15 F_C42.5@4380.48,4778.65 ; v1(4379,6993) 4394.51,7008.51 C43.1@4407.01,7008.51 ; F_C43.8@4385.41,5008.24 4412.27,5008.24 v1(4413.25,5007.26) ; v1@4413.25,5164.74 4413.25,5154.74 F_C44.6@4426.57,5141.42 ; v1(4413.34,5125.31) 4413.34,5123.15 F_C44.7@4426.57,5109.92 ; v1@4416.06,5167.55 4416.06,5202.67 4426.57,5192.16 F_C44.5@4426.57,5172.91 ; v1(4416.5,4655) v1@4416.64,4655.14 ; v1@4416.65,4655.12 F_C41.8@4456.1,4694.57 ; v1@4418.9,5046.63 4426.57,5054.3 F_C44.8@4426.57,5078.43 ; v1(4439,6943) 4446.51,6950.51 A_C10.2@4446.51,6979.49 ; F_C46.8@4447.76,5333.41 4447.76,5327.14 4455,5319.9 v1(4455,5320) ; v1(4455,5242) 4455,5241.41 4456.32,5240.09 F_C33.5@4482.26,5240.09 ; v1@4455.45,4655.75 4455.45,4662.42 F_C41.7@4487.6,4694.57 ; F_C46.7@4479.25,5333.41 4493.23,5319.44 4494.82,5319.44 4494.67,5319.29 4494.67,5319 4495,5319 v1(4495,5320) ; v1(4496.67,4652.69) 4496.67,4672.14 F_C41.6@4519.09,4694.57 ; v1(4497,5283) 4497.49,5283 4513.76,5266.74 F_C33.6@4513.76,5240.09 ; F_C46.6@4510.75,5333.41 4524.72,5319.44 4534.22,5319.44 4535.34,5318.32 4535.34,5318 4534,5318 v1(4534,5320) ; v1(4526.5,6758.5) A_C11.2@4550.51,6734.51 ; v1(4531,6853) 4544.51,6866.51 C34.2@4565.49,6866.51 ; v1(4533,4969.5) 4533.5,4969 F_C54.2@4565.44,4969 ; v1(4534,5281) 4534,5279 4533.84,5279 4533.84,5279.68 4534.19,5280.03 4534.19,5279.7 4545.25,5268.64 F_C33.7@4545.25,5240.09 ; v1(4534.35,4654.54) 4550.59,4670.79 F_C41.5@4550.59,4694.57 ; v1(4535,5360) 4541.03,5353.97 4542.24,5353.97 F_C46.5@4542.24,5333.41 ; v1(4575,5284) 4575.12,5284.12 4575.12,5284.29 4574.88,5284.29 4576.75,5282.43 F_C33.8@4576.75,5240.09 ; v1@4575.59,4693.05 4581.95,4699.41 F_C40.8@4605.76,4699.41 4605.76,4698.1 4611.2,4692.66 4611.2,4680.8 4620.07,4671.93 ; F_C34.5@4611.76,5232.59 4611.76,5245.12 v1@4612.91,5246.27 ; 4620.8,4671.93 4631.93,4660.8 4631.93,4637.32 v1(4652.54,4616.71) ; F_C40.7@4637.25,4699.41 4637.25,4669.08 v1(4651.44,4654.88) ; F_C34.6@4643.25,5232.59 4643.25,5214.75 v1(4652.5,5205.5) ; v1(4652,5128.31) 4657,5123.3 F_C51.2@4657,5094.56 4686.12,5123.68 v1@4692.34,5123.68 ; F_C53.2@4653,4841.44 4653,4812.34 v1(4654.82,4810.52) ; F_C40.6@4668.75,4699.41 4672.06,4699.41 4722.44,4649.03 4726.24,4649.03 v1(4729.5,4652.3) ; F_C34.7@4674.75,5232.59 4687.01,5244.85 v1(4691.67,5244.85) ; F_C40.5@4700.24,4699.41 4724.32,4699.41 v1(4729.84,4693.88) ; F_C34.8@4706.24,5232.59 4722.94,5232.59 v1@4731.03,5240.68 ; F_C35.8@4768.83,5188.3 4768.83,5205.35 v1@4770.39,5206.91 ; v1@4770.58,4729.07 4772.83,4731.31 F_C39.5@4772.83,4747.48 ; F_C35.7@4800.32,5188.3 4812.58,5200.56 v1@4812.58,5204.11 ; F_C39.6@4804.32,4747.48 4804.32,4734.33 v1(4806.99,4731.67) ; F_C35.6@4831.82,5188.3 4831.82,5189.6 v1(4846.33,5204.11) ; F_C39.7@4835.82,4747.48 v1(4850.21,4733.09) ; F_C48.8@4847.76,4423.41 4847.76,4381.02 v1(4849.03,4379.74) ; v1(4850.5,5008) 4859.17,5008 F_C37.8@4869.41,5018.24 ; F_C39.8@4867.32,4747.48 4875.49,4747.48 v1@4888.51,4734.46 ; F_C37.5@4869.41,4923.76 4884.76,4923.76 v1(4889.5,4928.5) ; F_C37.6@4869.41,4955.25 4878.29,4955.25 v1(4891.04,4968) ; F_C37.7@4869.41,4986.75 4870.25,4986.75 v1(4888.5,5005) ; F_C38.5@4872.48,4786.65 4872.48,4796.93 v1@4889.27,4813.72 ; F_C38.6@4872.48,4818.14 4883.61,4818.14 v1@4888.52,4813.23 ; F_C38.7@4872.48,4849.64 4891.15,4849.64 v1@4891.31,4849.79 ; F_C38.8@4872.48,4881.13 4883.33,4881.13 v1@4888.52,4886.33 ; F_C36.5@4872.48,5060.64 v1(4886.1,5047.02) ; F_C36.6@4872.48,5092.14 4885.2,5092.14 v1@4889.45,5087.88 ; F_C36.7@4872.48,5123.64 4889.55,5123.64 v1@4891.31,5125.39 ; F_C36.8@4872.48,5155.13 4881.73,5155.13 v1@4888.55,5161.95 ; F_C48.7@4879.25,4423.41 4879.25,4396.61 4888.51,4387.35 v1@4888.51,4380.14 ; F_C48.6@4910.75,4423.41 4926.63,4407.53 v1(4926.63,4378.64) ; v1@4925,5200 4913.3,5188.3 F_C35.5@4863.32,5188.3 4913,5188.3 v1(4926.96,5202.26) ; A_C7.2@4930,6717.56 4944.56,6717.56 v2(4962.5,6735.5) ; F_C48.5@4942.24,4423.41 4962.73,4423.41 v1(4966.95,4419.19) ; v2(4968.5,6708) 4968.5,6696.85 C27.1@4988.19,6677.17 ; v2(5166,6076) 5173.01,6083.01 U.1@5225.35,6083.01 ; R56.2@5188.47,4276 5214.5,4276 v1(5215.5,4275) ; F_C49.8@5274.59,4471.76 5296.19,4471.76 v1(5296.75,4471.2) ; F_C49.7@5274.59,4503.25 5297.61,4503.25 v1(5297.89,4502.97) ; F_C49.6@5274.59,4534.75 5299.12,4534.75 v1(5299.86,4535.49) ; F_C49.5@5274.59,4566.24 5297.27,4566.24 v1(5298.28,4567.26) ; F_C50.8@5274.59,5367.76 5296.57,5367.76 v1@5296.94,5367.38 ; F_C50.7@5274.59,5399.25 5295.39,5399.25 5296,5398.64 v1(5296,5385.5) ; F_C50.6@5274.59,5430.75 5296.06,5430.75 5296.12,5430.8 5300.5,5426.42 v1(5300.5,5423.5) ; F_C50.5@5274.59,5462.24 5295.27,5462.24 v1(5295.84,5461.67)
  Bottom Layer w10: v2(2116.57,5826.81) 2125.76,5836 R46.2@2164.47,5836 ; v2@2151.06,4218.23 2151.06,4226.48 F_C13.2@2151.06,4284.41 ; v2@2155,5336.34 F_C15.2@2155,5402.52 ; R36.2@2308,4246.47 2367.58,4246.47 v1(2370.39,4249.29) ; F_C30.2@2882.01,4839.88 2887.6,4839.88 v1(2916.26,4811.22) ; F_C16.2@3641.22,4544.25 3641.22,4602.18 v2(3641.22,4610.44) ; F_C14.2@3655,5619.06 3655,5676.98 v2(3655,5685.24) ; F_C52.2@4776.56,4969 4811.31,4969 v1(4812.3,4968) ; F_C52.2@4781.12,4973.01 4781.12,4978.6 v1(4809.78,5007.26) ; v2(5287.4,6711.38) C41.1@5287.4,6744.09 ; C26.1@5389.76,6803.15 v2(5389.76,6835.87) ; F_C59.2@5428,4391.57 5428,4453.5 v2(5439.5,4465) ; F_C58.2@5428,4920.43 5428,4853.5 v2(5431.5,4850) ; v2(5429,5648) 5429,5573.43 F_C55.2@5432,5570.43 ; F_C56.2@5430,5043.57 5430,5069 5470,5109 v2(5470,5112.5)
  Bottom Layer w40: v4@3085.5,6144 v4@3088,6146.5 ; v4(3087,6145.5) v4@3088,6146.5 ; diode.1@3088,6209.56 v4@3088,6146.5 ; v4(5190.5,6399) 5226.34,6363.16 U.7@5226.34,6335.96 ; U.9@5226.34,5956.04 5289,5893.38 v4(5289,5889) ; U.8@5393.66,5956.04 5459.7,5890 v4(5460.22,5890) ; U.6@5393.66,6335.96 5441,6383.3 v4(5441,6405.5)
  other v1: 4888.5,4379.5 4455.5,4655 4575.5,4693 4770.5,4729.5 4377,4732.5 4888,4734 4338.5,4771 4338.5,4811.5 4888.5,4812.5 4339,4850 4890.5,4850 4888,4887 4376.5,4892 4417,5047 4889,5088 4890.5,5125.5 4888,5163 4413.5,5165 4812,5204 4770,5206.5 4730,5241.5 4613,5246 5291,5362 4613.5,7022
  other v2: 2150.43,4220.87 2155.51,5332.68 4951,6294.5
  other v4: 2406.26,6528.35 3530.28,6605.43 2579.49,6666.42 3530.79,6703.54 3146.14,7153.31
NetARM_1: ARM.1 H1.3 | length 3751.2
  Top Layer w6: H1.3@2224,6018 2224,6063.51 2185.47,6102.04 2185.47,6133.96 2208.04,6156.53 2239.96,6156.53 2345.47,6051.01 2345.47,6002.04 2390.99,5956.53 2399.96,5956.53 2445.47,5911.01 2445.47,5884.74 2529.22,5801 2733.75,5801 2821.87,5712.88 3307.38,5712.88 ; 3310,5715.5 3307.38,5712.88 ; ARM.1@4709.5,6841.5 4670,6802 4563.37,6802 4562.37,6803 4546.63,6803 4537.63,6794 3997.85,6794 3997.22,6794.63 3971.49,6794.63 3921,6744.14 3921,6714.83 3930.5,6705.33 3930.5,6441.47 3784.5,6295.47 3784.5,6109.96 3721.71,6047.17 3721.71,5986.92 3653,5918.22 3653,5848.45 3559.32,5754.77 3559.32,5737.8 3554.05,5732.53 3327.03,5732.53 3307.38,5712.88
NetARM_2: ARM.2 FPGA1.C3 | length 4434.3
  Top Layer w6: FPGA1.C3@4117.5,4436.5 FPGA1.C3@4120.5,4436.5 ; FPGA1.C3@4117.5,4437.5 4117.5,4452.23 4101.66,4468.07 4101.66,4483.68 4112.7,4494.72 4167.68,4494.72 4178.72,4483.68 4178.72,4389.33 4167.68,4378.29 4153.75,4378.29 4141.03,4365.57 4141.03,4316.97 v1(4191.5,4266.5) ; ARM.2@4694,6859.07 4694,6859.5 ARM.2@4696,6861.5 ; ARM.2@4694.5,6861.5 ARM.2@4696,6861.5 ; v2(4745,6644) 4745,6643.48 v2@4747,6641.48 ; v1(4746,6899.5) 4735.5,6899.5 4697.5,6861.5 ARM.2@4696,6861.5 ; v2@4747,6644 v2@4747,6641.48 ; v2(5186.5,5652.5) 5189.47,5655.47 5189.47,5914.62 5277.69,6002.84 5277.69,6281.16 5233.57,6325.28 5085.72,6325.28 4975.28,6435.72 4952.76,6435.72 v2@4747,6641.48
  Bottom Layer w6: v1(4191.5,4266.5) 4841.36,4266.5 4985.95,4411.09 4985.95,4422.9 5078.87,4515.82 5093.24,4515.82 5183.11,4605.69 5183.11,4968.68 5203.99,4989.56 5203.99,5025.18 5183.11,5046.06 5183.11,5226.67 5319.5,5363.06 5319.5,5508.66 5288.72,5539.44 5274.35,5539.44 5236.35,5577.44 5196.98,5577.44 5184.48,5589.94 5184.48,5654.5 v2(5186.5,5652.5) ; v2(4745,6644) 4745,6898.5 v1(4746,6899.5)
NetARM_3: ARM.3 FPGA1.AE24 FPGA.AE24 H1.5 R45.2 | length 9259.7
  Top Layer w6: H1.5@2230.08,6115.12 2306.3,6038.9 2306.3,5832.15 2227.97,5753.82 2227.97,5512.01 2258.63,5481.35 2272.77,5481.35 2285.5,5468.63 2285.5,5454.71 2298.22,5441.98 2351.51,5441.98 2365.92,5427.58 2365.92,5374.28 2376.96,5363.24 2430.25,5363.24 2442.98,5350.52 2442.98,5297.23 2455.7,5284.5 2508.99,5284.5 2521.72,5271.78 2521.72,5257.86 2526.26,5253.31 2526.26,5239.45 2523.4,5236.59 2523.4,5100.38 2510.68,5087.65 2496.75,5087.65 2482.35,5073.25 2482.35,5059.32 2471.31,5048.28 2457.38,5048.28 2444.66,5035.56 2444.66,4901.84 2455.7,4890.8 2469.62,4890.8 2484.03,4876.4 2484.03,4862.47 2496.75,4849.75 2510.68,4849.75 2521.72,4838.71 2521.72,4785.42 2536.12,4771.01 2550.05,4771.01 2561.09,4759.97 2561.09,4667.31 2573.81,4654.58 2627.1,4654.58 2639.83,4641.86 2639.83,4627.94 2652.55,4615.21 2666.47,4615.21 2679.2,4602.49 2679.2,4588.57 2691.92,4575.84 2863.33,4575.84 2876.05,4563.12 2876.05,4549.2 2888.77,4536.47 2983.12,4536.47 2994.16,4547.51 2994.16,4600.81 3006.88,4613.53 3099.55,4613.53 3112.27,4626.25 3112.27,4640.18 3124.99,4652.9 3140.6,4652.9 3159.44,4634.06 FPGA.AE24@3172.17,4634.06 3178.48,4627.74 3191.21,4627.74 3192.69,4629.22 3192.69,4641.86 3203.73,4652.9 3243.1,4652.9 3298.08,4652.9 3299.74,4651.24 3310.8,4640.18 3310.8,4626.25 3321.84,4615.21 3453.88,4615.21 3468.28,4600.81 3468.28,4508.14 3479.32,4497.1 3494.93,4497.1 3514.5,4516.67 3514.5,4546.5 v1(3536.5,4568.5) ; v2(2427,6353) 2430.53,6356.53 2499.96,6356.53 2554.58,6301.91 2554.58,6102.37 2644.54,6012.41 2644.54,6010.05 2689.09,5965.5 3427,5965.5 3460,5998.5 3460,6108.63 3667.17,6315.8 3704.44,6315.8 3897,6508.36 3897,6754.09 3932.5,6789.59 v1(3932.5,6804.5) ; v1(4124.5,6814) 4125.5,6815 4567.34,6815 4568.34,6814 4623.5,6814 ARM.3@4684.5,6875 ; FPGA1.AE24@4988,5263 v1(5006.5,5244.5)
  Bottom Layer w6: H1.5@2228.39,6115.12 2235.03,6108.47 R45.2@2298,6108.47 2345.47,6155.94 2345.47,6233.96 2368.04,6256.53 2377.01,6256.53 2422.53,6302.04 2422.53,6348.53 v2(2427,6353) ; R45.2@2301.18,6102.36 R45.2@2303.15,6102.36 ; v1(3536.5,4568.5) 3597.44,4629.44 3663.25,4629.44 3869.47,4423.22 3869.47,4421.07 3906.54,4384 3971.87,4384 4060.4,4295.47 4493.06,4295.47 4554.56,4356.97 4580.06,4356.97 4672.67,4449.58 4672.67,4463.95 4719.72,4511 4807.4,4511 5077,4780.6 5077,4879.54 5191.99,4994.53 5191.99,5020.21 5077,5135.2 5077,5174 v1(5006.5,5244.5) ; v1(3932.5,6804.5) 3960,6832 4106.5,6832 v1(4124.5,6814)
NetARM_5: ARM.5 FPGA1.AF24 FPGA.AF24 H1.1 R46.1 | length 9233.1
  Top Layer w6: H1.1@2224,5918 2224,5963.51 2174.53,6012.99 2174.53,6096.02 2173.47,6097.07 2173.47,6138.93 2203.07,6168.53 2487.96,6168.53 2542.58,6113.91 2542.58,6097.4 2632.54,6007.44 2632.54,6005.08 2684.12,5953.5 3431.97,5953.5 3465.53,5987.06 3494.06,5987.06 3570.83,6063.83 3704.44,6063.83 3709.71,6069.11 3709.71,6237.65 3909,6436.94 3909,6749.12 3966.52,6806.63 4044.26,6806.63 4070.63,6833 4132.37,6833 4133.37,6832 4587,6832 ARM.5@4658,6903 ; H1.1@2224.85,5918.85 H1.1@2227.07,5916.63 ; H1.1@2228.35,5915.35 H1.1@2227.07,5916.63 ; H1.1@2229.37,5918.94 H1.1@2227.07,5916.63 ; v1(3527.5,4601) 3530.87,4601 3555.5,4576.37 3555.5,4518.3 3494.93,4457.73 3479.32,4457.73 3468.28,4468.77 3468.28,4482.69 3455.56,4495.42 3441.64,4495.42 3428.91,4508.14 3428.91,4561.44 3414.51,4575.84 3321.84,4575.84 3310.8,4586.88 3310.8,4600.81 3298.08,4613.53 3188.45,4613.53 3186.24,4615.74 3186.24,4608.76 FPGA.AF24@3172.17,4594.69 3170.48,4594.69 3151.64,4613.53 3124.99,4613.53 3113.95,4602.49 3113.95,4588.57 3101.23,4575.84 3047.94,4575.84 3033.53,4561.44 3033.53,4547.51 3022.49,4536.47 3008.57,4536.47 2994.16,4522.06 2994.16,4508.14 2983.12,4497.1 2888.77,4497.1 2876.05,4509.83 2876.05,4523.75 2863.33,4536.47 2691.92,4536.47 2679.2,4549.2 2679.2,4563.12 2666.47,4575.84 2652.55,4575.84 2639.83,4588.57 2639.83,4602.49 2627.1,4615.21 2573.81,4615.21 2561.09,4627.94 2561.09,4641.86 2548.36,4654.58 2534.44,4654.58 2521.72,4667.31 2521.72,4681.23 2510.68,4692.27 2496.75,4692.27 2484.03,4704.99 2484.03,4758.28 2469.62,4772.69 2471.31,4772.69 2482.35,4783.73 2482.35,4799.34 2471.31,4810.38 2457.38,4810.38 2442.98,4824.79 2442.98,4878.08 2430.25,4890.8 2416.33,4890.8 2405.29,4901.84 2405.29,5035.56 2416.33,5046.6 2430.25,5046.6 2444.66,5061.01 2444.66,5074.93 2457.38,5087.65 2471.31,5087.65 2482.35,5098.69 2482.35,5153.67 2469.62,5166.39 2455.7,5166.39 2442.98,5179.12 2442.98,5193.04 2431.94,5204.08 2378.64,5204.08 2364.24,5218.49 2364.24,5232.41 2351.51,5245.13 2337.59,5245.13 2324.87,5257.86 2324.87,5271.78 2312.14,5284.5 2248.27,5284.5 2215.97,5316.81 2215.97,5826.52 2222.64,5833.19 2222.64,5912.2 H1.1@2227.07,5916.63 ; FPGA1.AF24@5026.31,5261.48 FPGA1.AF24@5026.31,5263.17 ; FPGA1.AF24@5027.5,5263.5 5047,5283 v1(5048,5283)
  Bottom Layer w6: R46.1@2223.53,5836 2223.53,5899.9 H1.1@2231.18,5907.56 ; v1(3527.5,4601) 3567.94,4641.44 3668.22,4641.44 3881.47,4428.19 3881.47,4426.04 3911.51,4396 3976.84,4396 4065.37,4307.47 4437.45,4307.47 4486.95,4356.97 4515.19,4356.97 4595.3,4437.08 4626.58,4437.08 4712.5,4523 4802.43,4523 5065,4785.57 5065,4884.51 5179.99,4999.5 5179.99,5015.24 5065,5130.23 5065,5159 4987.5,5236.5 4987.5,5252.37 4998.63,5263.5 5028.5,5263.5 v1(5048,5283)
NetARM_10: ARM.10 C33.1 C34.1 L4.2 | length 299.9
  Top Layer w10: v1(4545,6928) 4611.29,6994.29 4677.79,6994.29 4689,7005.5 4689,7010 4669.5,7010 v2(4648,7031.5)
  Bottom Layer w10: C34.1@4526.51,6905.49 4545,6923.97 v1(4545,6928) ; v2@4648,7033 4659.5,7044.5 L4.2@4682.49,7044.5
NetARM_17: ARM.17 B1.1 B1.2 R49.1 | length 1416
  Top Layer w6: B1.1@3948.87,6233.8 3991,6275.93 v2(3991,6283.5) ; v2(4292,6285) 4292,6243.5 B1.2@4307.5,6228 ; B1.2@4306,6224 4306,6226 B1.2@4308.5,6228.5 ; B1.2@4314,6234.5 4326.63,6247.13 4326.63,6451.84 4324.5,6453.97 4324.5,6564.87 4352,6592.37 v1(4352,6769) ; B1.2@4315.25,6233.25 4317.53,6235.53 R49.1@4382,6235.53 ; v1(4364.5,6873.5) 4368,6877 4368,6947.36 ARM.17@4488.51,7067.86
  Bottom Layer w6: v2(3991,6283.5) 3994.84,6279.66 4286.66,6279.66 v2(4292,6285) ; v1(4352,6769) 4364.5,6781.5 v1(4364.5,6873.5)
NetARM_22: ARM.22 C43.2 OSC2.1 | length 600.1
  Top Layer w6: ARM.22@4418.91,7137.46 4440.77,7159.32 4482.68,7159.32 4488.18,7159.32 4490.87,7156.63 v1(4489.86,7156.63) ; v1@4491,7156.5 v1@4491.5,7156
  Bottom Layer w6: C43.2@4446.76,7048.39 4525.5,7127.13 ; v1(4489.86,7156.63) 4489.99,7156.5 4511.87,7156.5 4525.5,7142.87 4525.5,7127.13 ; 4713.5,7170.5 OSC2.1@4752.5,7209.5 ; OSC2.1@4783.01,7212 4610.37,7212 4525.5,7127.13
NetARM_23: ARM.23 C42.2 OSC2.2 | length 224
  Top Layer w6: v1(4368,7119.5) 4373.11,7119.5 ARM.23@4404.99,7151.38
  Bottom Layer w6: v1@4368,7118.5 4368.98,7118.5 C42.2@4407.99,7079.49 ; v1(4368,7119.5) 4368,7183 OSC2.2@4378.5,7193.5 ; OSC2.2@4445.5,7216.5 4451.83,7210.17 4467.9,7210.17 4462.23,7204.5 OSC2.2@4456,7204.5
NetARM_24: ARM.24 SDC0.1 | length 193.3
  Top Layer w6: v2(4336,7133) 4346.43,7143.43 4369.2,7143.43 ARM.24@4391.07,7165.3
  Bottom Layer w6: SDC0.1@4214,7140 4221,7133 v2(4336,7133)
NetARM_25: ARM.25 SDA0.1 | length 185.8
  Top Layer w6: v2(4282.5,7219.5) 4318.43,7183.57 4372.79,7183.57 ARM.25@4377.15,7179.22
  Bottom Layer w6: SDA0.1@4214,7205 4228.5,7219.5 v2(4282.5,7219.5)
NetARM_29: ARM.29 R8.1 | length 1786.6
  Top Layer w6: ARM.29@4241.5,7146 ARM.29@4242,7145.5 ; ARM.29@4242,7146.5 4242,7149 4227.23,7163.77 4227.23,7178.43 4229.8,7181 4262.5,7213.7 4262.5,7226.37 4276.66,7240.53 5081.96,7240.53 5104.53,7217.96 5104.53,7186.04 5097.47,7178.99 5097.47,6580.07 5104.53,6573.02 5104.53,6467.9 5091.5,6454.87 v2(5091.5,6450.5)
  Bottom Layer w6: R8.1@5054,6422 5063,6422 v2(5091.5,6450.5)
NetARM_30: ARM.30 R7.1 | length 1846.6
  Top Layer w6: ARM.30@4235,7124.5 4201,7158.5 4201,7181.84 4271.69,7252.53 4571,7252.53 5086.93,7252.53 5116.53,7222.93 5116.53,7181.07 5109.47,7174.02 5109.47,6585.04 5123,6571.51 v2(5123,6459.5)
  Bottom Layer w6: R7.1@5118.11,6415.35 5118.11,6454.61 v2(5123,6459.5)
NetARM_48: ARM.48 TX2.1 | length 144.2
  Top Layer w6: v2@3981,6964.5 v2(3980.5,6964) 3962.76,6946.26 3962.76,6894.85 ARM.48@3984.62,6872.99
  Bottom Layer w6: TX2.1@3979,6999.5 3980.5,6998 v2(3980.5,6964)
NetARM_49: ARM.49 RX2.1 | length 163.8
  Top Layer w6: v2(3913.5,6960.5) 3913.5,6915.5 3952,6877 3952.77,6877 ARM.49@3970.7,6859.07
  Bottom Layer w6: v2(3913.5,6960.5) 3913.5,6998 RX2.1@3914,6998.5
NetARM_52: ARM.52 FPGA1.J25 FPGA.J25 H2.7 R43.1 | length 4880.4
  Top Layer w6: FPGA.J25@3211.54,5263.98 3230.38,5282.82 v1@3271.27,5282.82 ; v2@3674.17,5709.8 3687.58,5709.8 3711.32,5686.06 v2(3782.4,5686.06) ; v2(3847.28,5656.65) 3874.21,5629.72 3891.65,5629.72 3888.5,5626.57 v2(3888.5,5626.5) ; v2(3957,6485) 3948.84,6493.16 3948.84,6721.07 3969.5,6741.73 ARM.52@3969.5,6744.5 ; v2(4112,5904) 4113.5,5904 4336.2,5681.3 4336.2,5491.69 4323.47,5478.97 4309.55,5478.97 4298.51,5467.93 4298.51,5412.95 4309.55,5401.91 4323.47,5401.91 4336.2,5389.19 4336.2,5323.17 FPGA1.J25@4356.72,5302.65 4356.72,5302.83 FPGA1.J25@4357.02,5302.54
  Bottom Layer w6: H2.7@2485.55,6216.57 2534.55,6167.57 2534.55,5992 2546.53,5980.03 2546.53,5902.93 2656.53,5792.93 2656.53,5751.07 2654.53,5749.07 2654.53,5721.07 2654.35,5720.89 2654.35,5719.87 2670.74,5703.47 2686.45,5703.47 2738.42,5651.5 3340.87,5651.5 3361.38,5672.01 3554.49,5672.01 3602.45,5719.97 3664,5719.97 v2(3672.16,5711.82) ; v1(3271.65,5282.44) 3313.71,5282.44 3333.93,5302.66 3675.32,5302.66 3694.16,5321.5 3695.45,5321.5 3731.31,5357.36 3731.31,5402.86 3808.92,5480.48 3808.92,5496.22 3807.87,5497.26 3807.87,5571.38 3885.35,5648.86 ; v2(3782.4,5686.06) 3811.81,5656.65 v2(3847.28,5656.65) ; v2@3888.82,5626.97 3885.35,5630.43 3885.35,5648.86 ; 3890,5653.5 3886.85,5650.35 ; v2(3957,6485) 3957,6111.87 3965,6103.87 3965,6050.5 v2@4110,5905.5 ; 4079.24,5898.26 3911.1,5730.12 3911.1,5676.63 3885.84,5651.37 ; 4079.5,5898 4085.5,5904 v2(4112,5904) v2@4112,5905.5 ; 3885.35,5648.86 3885.35,5651.85 3885.84,5651.37 ; 3885.35,5648.86 3886.85,5650.35 ; 3885.84,5651.37 3886.85,5650.35